# Altium PCB PCB4.PcbDoc
Units mil, origin at the board's own origin, x right, y up, seen from the top; angles counter-clockwise.
Board outline 6000 x 4000 mil, 2 copper layers (Top Layer, Bottom Layer); 36 components, 26 nets, 78 pads, 8 vias.
Unrouted connection lines stored in the file: 17.
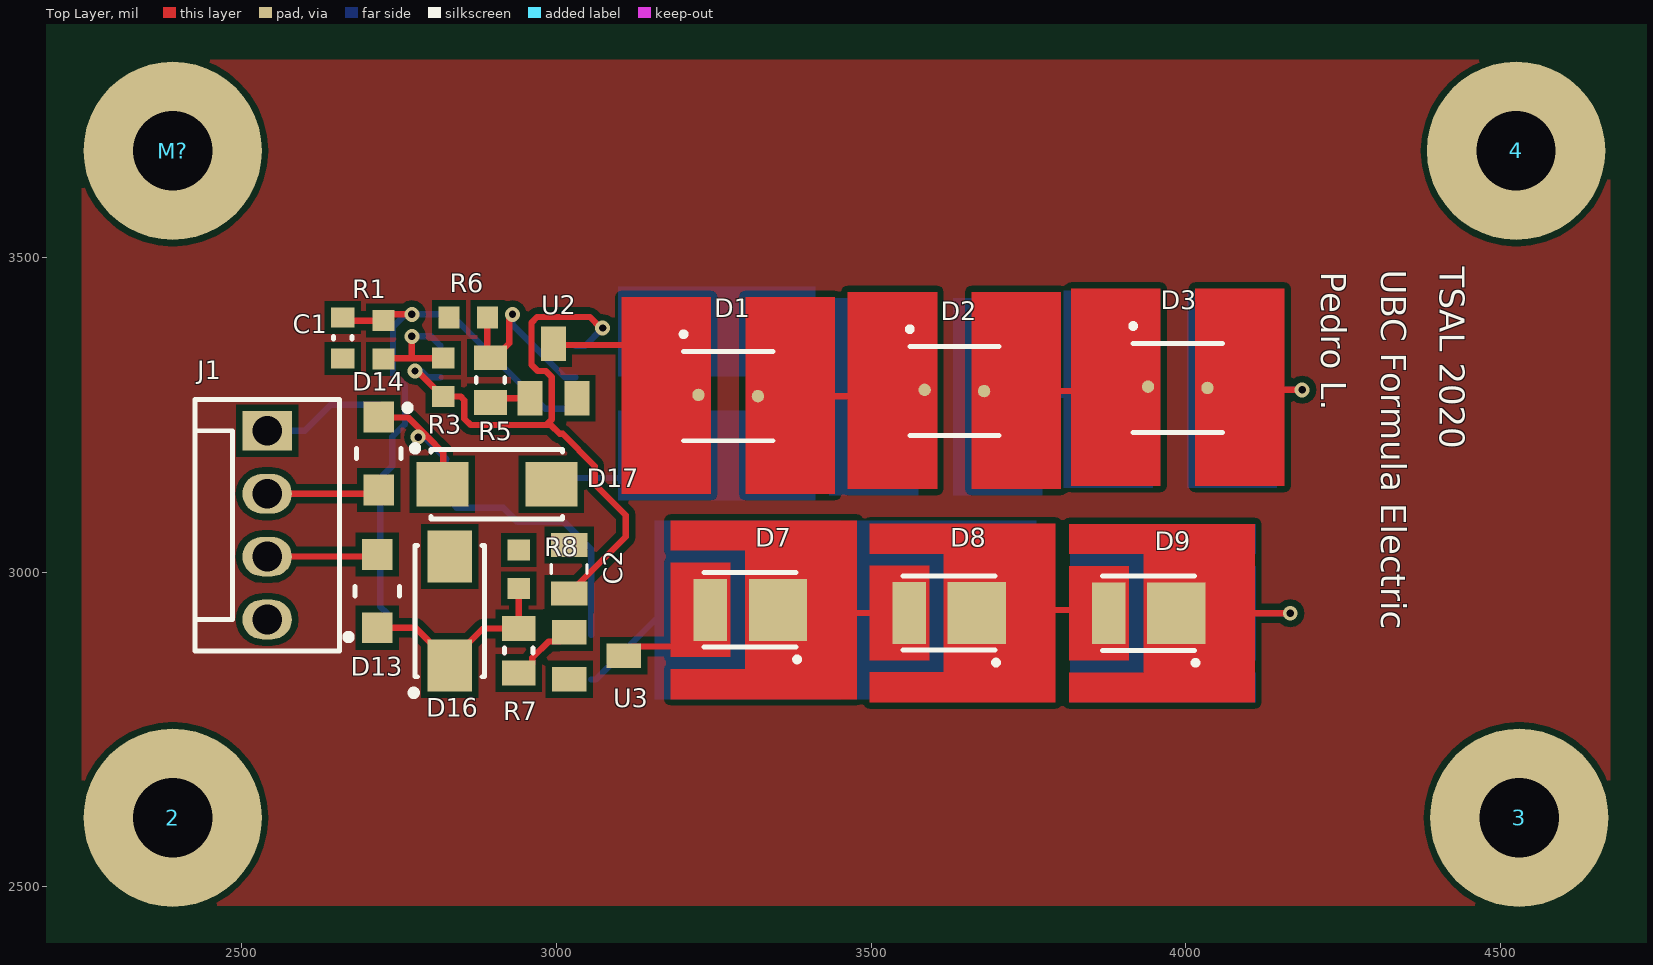
[diagram p0: Top Layer view]
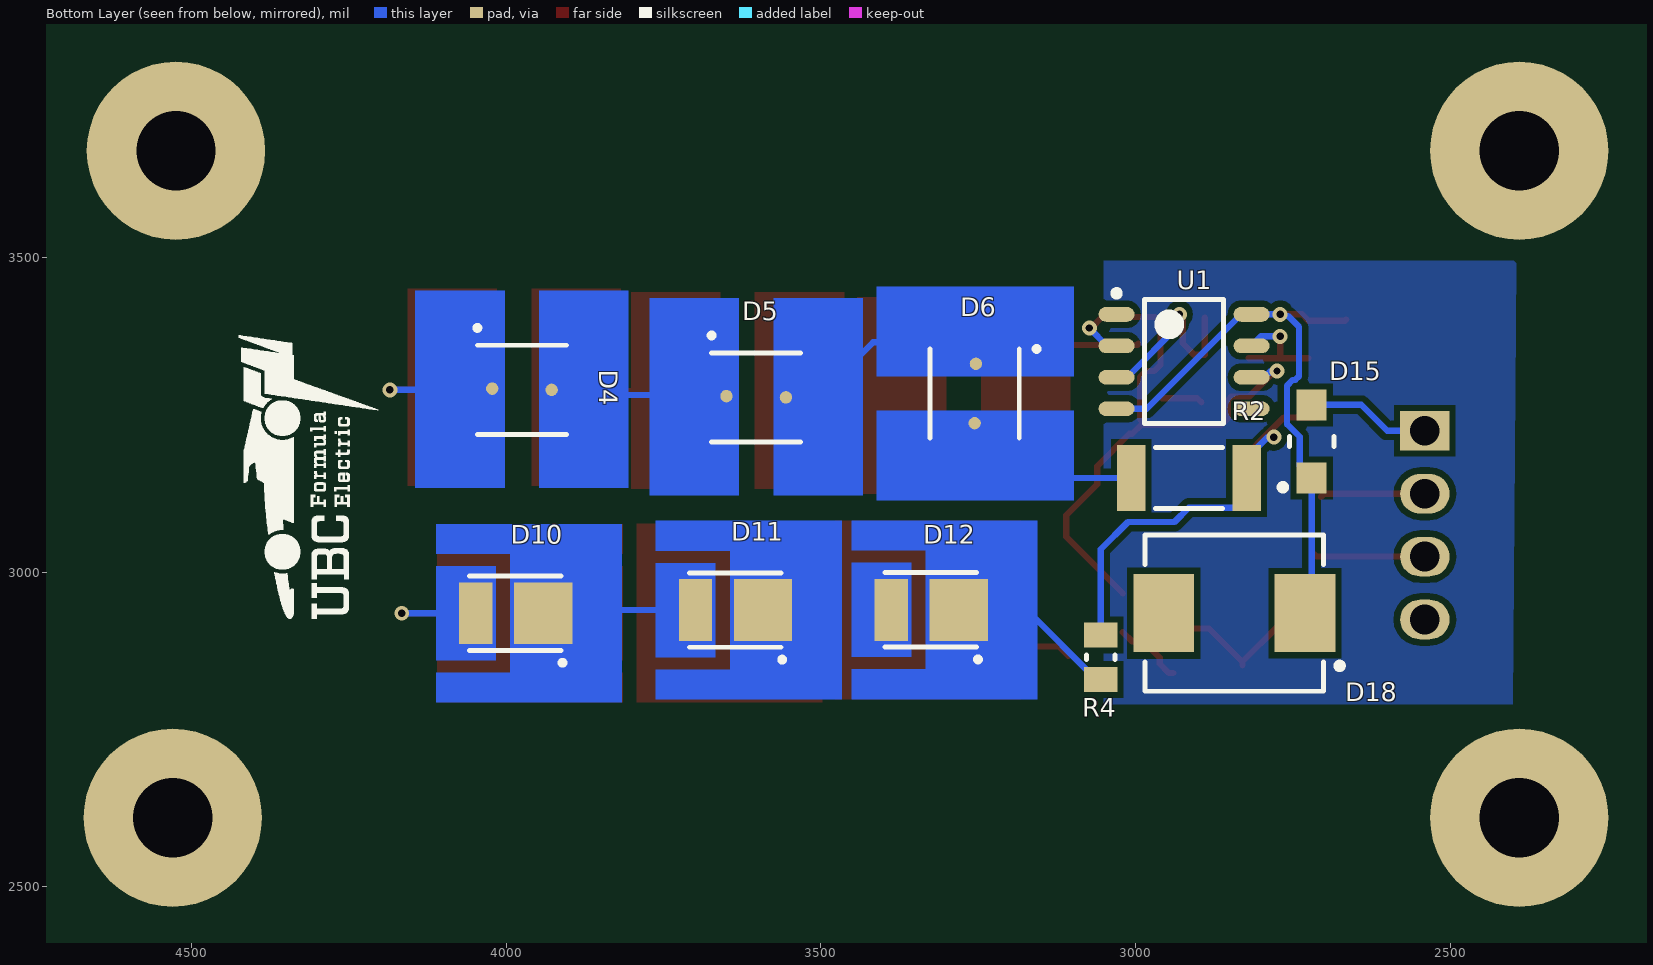
[diagram p1: Bottom Layer view, seen from below]
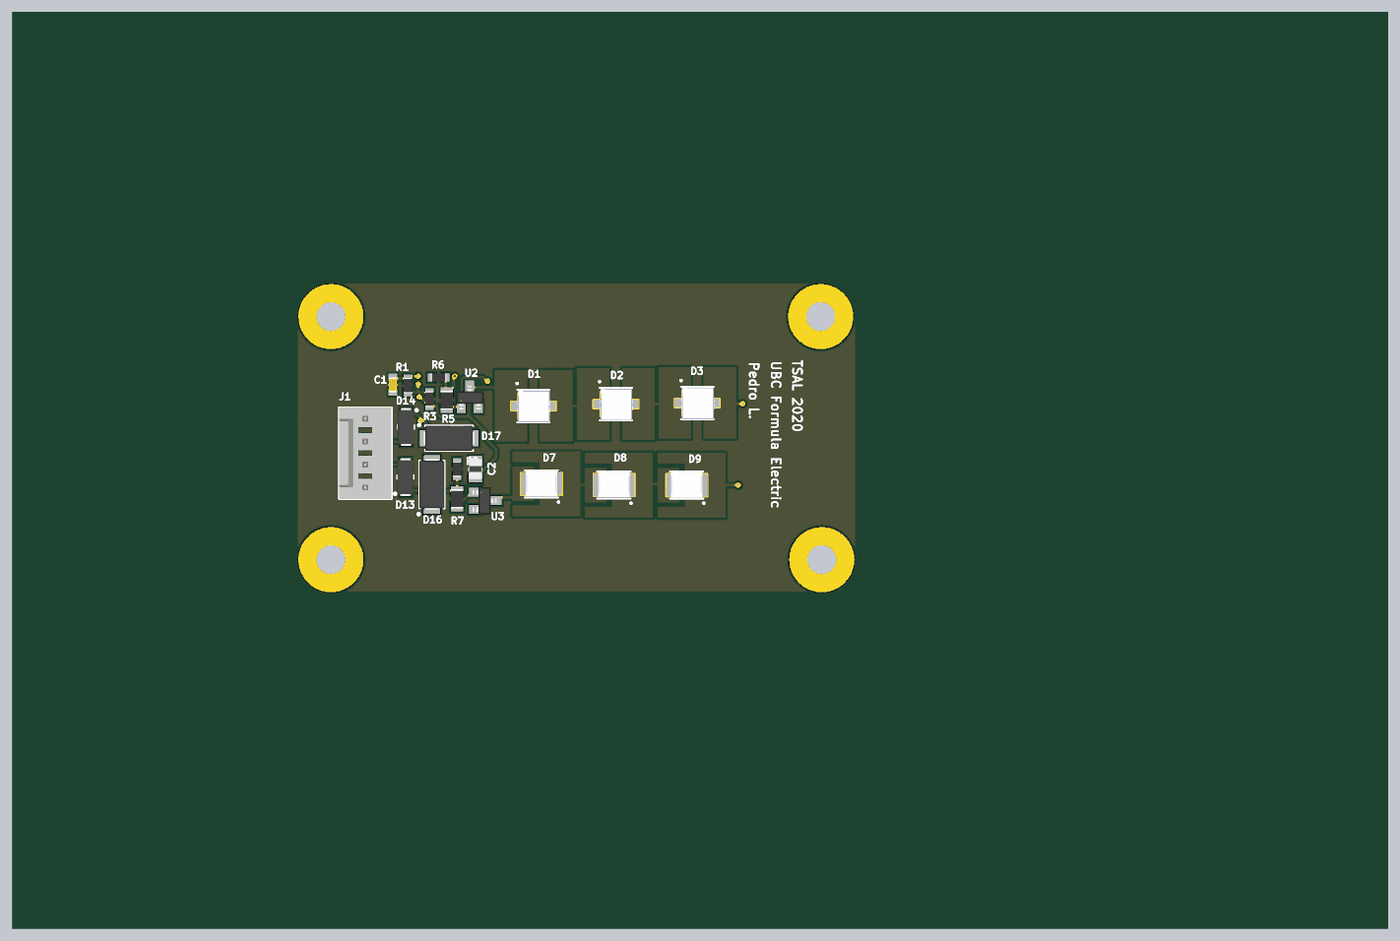
[diagram p2: 3D render of the assembled board from above, using the file's embedded part models]
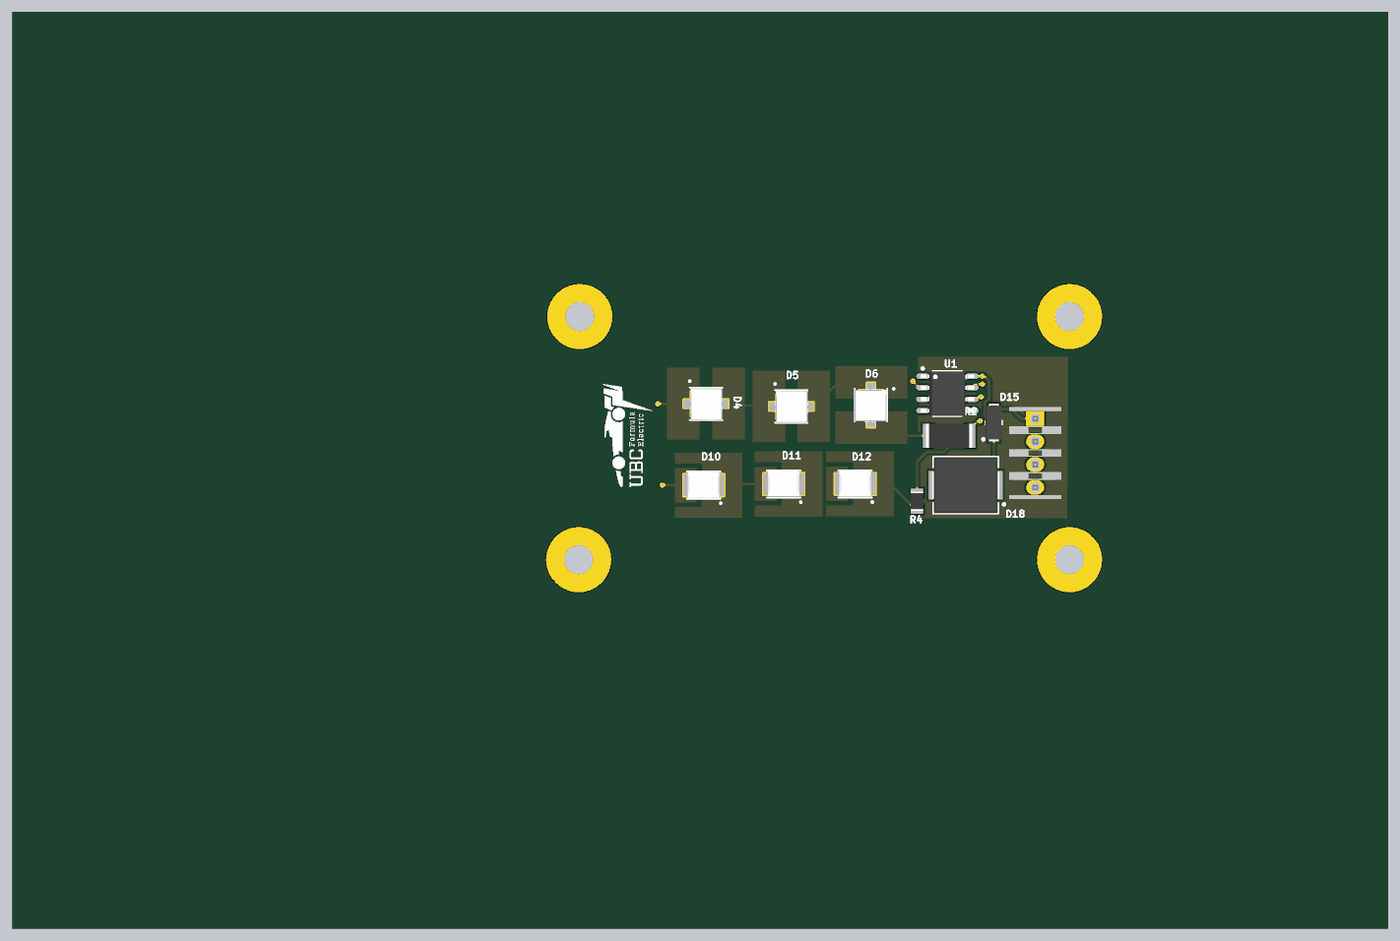
[diagram p3: 3D render of the assembled board from below, using the file's embedded part models]

## Layer stack, top to bottom
Top Solder: solder mask 0.4, Solder Resist, Dk 3.5
Top Layer: signal copper 1.4
Dielectric 1: dielectric 12.6, FR-4, Dk 4.8
Bottom Layer: signal copper 1.4
Bottom Solder: solder mask 0.4, Solder Resist, Dk 3.5

## Board outline
1000,1000 7000,1000 7000,5000 1000,5000

## Design rules (kind name [scope] priority, off if disabled: settings)
Clearance [All] p1: gap=10 ignorepadtopadclearanceinfootprint=FALSE except(0: Arc-Hole Track-Hole SMDPad-Hole THPad-Hole Via-Hole Fill-Hole Poly-Hole Region-Hole Text-Hole)
PolygonConnect [All] p1: connectstyle=Relief reliefconductorwidth=10 reliefentries=4 polygonreliefangle="90 Angle" airgapwidth=10
RoutingVias [All] p1: holewidth=28 width=50 viastyle="Through Hole" minholewidth=28 minwidth=50 maxholewidth=28 maxwidth=50
SolderMaskExpansion [All] p1: expansion=4 istentingtop=FALSE
Width [All] p1: maxlimit=10 minlimit=10 preferedwidth=10
30 further rules are at their usual default settings.

## Components (designator, comment, footprint, x,y, rotation, side; value= is the part's Value field where it differs from the comment)
2 "M3" "M3 Mounting Hole"#1 2390,2560 r90 top
3 "M3" "M3 Mounting Hole"#2 4530,2610 r90 top
4 "M3" "M3 Mounting Hole"#2 4525,3670 r90 top
C1 "0603" "0603 CAPACITOR (TDK C-SERIES)" 2660,3372.52 r270 top
C2 "X7R" RESC0805X60N 3020,3005 r90 top
D1 "RED" "RED LED" 3272.76,3280 r90 top
D2 "RED" "RED LED" 3632.24,3288.03 r90 top
D3 "RED" "RED LED" 3987.24,3293.03 r90 top
D4 "RED" "RED LED" 3975,3290 r90 bottom
D5 "RED" "RED LED" 3602.76,3278.03 r90 bottom
D6 "RED" "RED LED" 3255.51,3284.21 r180 bottom
D7 "GREEN" "GREEN LED" 3342.91,2940.32 r0 top
D8 "GREEN" "GREEN LED" 3659.06,2935.32 r0 top
D9 "GREEN" "GREEN LED" 3976.14,2935 r0 top
D10 "GREEN" "GREEN LED" 3950,2935 r180 bottom
D11 "GREEN" "GREEN LED" 3600.79,2940 r180 bottom
D12 "GREEN" "GREEN LED" 3289.61,2940.32 r180 bottom
D13 "NRVTS260ESFT1G" "ON NRVTS260ESFT1G" 2715,2970 r90 top
D14 "NRVTS260ESFT1G" "ON NRVTS260ESFT1G" 2717.5,3188.64 r270 top
D15 "NRVTS260ESFT1G" "ON NRVTS260ESFT1G" 2720,3208.07 r90 bottom
D16 "SMAJ6.0A" "LITTELFUSE SMAJ6.0A" 2830,2938.39 r90 top
D17 "SMAJ6.0A" "LITTELFUSE SMAJ6.0A" 2905,3140 r0 top
D18 "SMCJ24A" "LITTELFUSE SMCJ24A" 2842.8,2935 r0 bottom
J1 "1x4 Header" HDR1x4 2540,3075 r0 top
M? "M3" "M3 Mounting Hole"#3 2415,3700 r0 top
R1 "0603" "0603 RESISTOR (YAGEO)" 2725,3369.49 r90 top
R2 "2010" "2010 RESISTOR (YAGEO)" 2915,3150 r180 bottom
R3 "0603" "0603 RESISTOR (YAGEO)" 2820,3310 r90 top
R4 "RL1220S-270-F" "0805 RESISTOR (YAGEO)" 3055,2865 r90 bottom
R5 "0805" "0805 RESISTOR (YAGEO)" 2895,3305.43 r270 top
R6 "0603" "0603 RESISTOR (YAGEO)" 2859.49,3405 r0 top
R7 "0805" "0805 RESISTOR (YAGEO)" 2940,2875.43 r270 top
R8 "0603" "0603 RESISTOR (YAGEO)" 2940,3005 r270 top
U1 "555" SOIC-8 2922.72,3335 r180 bottom
U2 "2N7002ET1G" 2N7002ET1G 2995,3320 r0 top
U3 "2N7002ET1G" 2N7002ET1G 3063.31,2867.4 r270 top

## Footprints (in the part's own frame and the unit in brackets; to place one, negate y for a bottom-side part, rotate by r counter-clockwise, add the part's x,y. Pads: shape width x height; smd on the part's side, far side on the other; paste and mask are expansions set on the pad)
2N7002ET1G [mm]
  rect 1x1.4 smd: 1(-0.95,-1.1) 2(0.95,-1.1) 3(0,1.1)
  body extent -1.5,-1.4 1.55,1.24, height 1.12
"0603 CAPACITOR (TDK C-SERIES)" [mm] "Chip Capacitor, 2-Leads, Body 1.60x0.80mm, IPC Medium Density"
  rect 0.8x0.95 smd: 1(-0.825,0) 2(0.825,0)
  silkscreen extent -0.05,-0.38 0.05,0.38, body extent -0.85,-0.45 0.85,0.45, height 0.9
"0603 RESISTOR (YAGEO)" [mm] "Chip Resistor, 2-Leads, Body 1.60x0.80mm, IPC Medium Density"
  rect 0.85x0.9 smd: 1(-0.775,0) 2(0.775,0)
  body extent -0.85,-0.45 0.85,0.45, height 0.55
"0805 RESISTOR (YAGEO)" [mm] "Chip Resistor, 2-Leads, Body 2.00x1.25mm, IPC Medium Density"
  rect 1x1.35 smd: 1(-0.9,0) 2(0.9,0)
  silkscreen extent -0.1,-0.58 0.1,0.58, body extent -1.05,-0.67 1.05,0.67, height 0.6
"2010 RESISTOR (YAGEO)" [mm] "Chip Resistor, 2-Leads, Body 5.00x2.50mm, IPC Medium Density"
  rect 1.15x2.65 smd: 1(-2.325,0) 2(2.325,0)
  silkscreen extent -1.35,-1.22 1.35,1.23, body extent -2.55,-1.33 2.55,1.33, height 0.65
"GREEN LED" [mm]
  rect 1.35x2.5 smd: 1(-2.5,0)
  rect 2.35x2.5 smd: 2(0.225,0)
  Top Layer region: -4.1,-3.6 -4.1,-2.4 -1.1,-2.4 -1.1,-1.25 -1.1,1.25 -1.1,2.4 -4.1,2.4 -4.1,3.6 3.4,3.6 3.4,-3.6
  Top Layer region: -4.1,-1.9 -1.7,-1.9 -1.7,-1.25 -1.7,1.25 -1.7,1.9 -4.1,1.9
  silkscreen extent -2.75,-2.07 1.07,1.5, body extent -2.65,-1.35 0.85,1.45, height 0.81
HDR1x4 [mm]
  rect 2x1.6 hole 1.2: 1(0,3.81)
  oval 2x1.6 hole 1.2: 2(0,1.27) 3(0,-1.27) 4(0,-3.81)
  silkscreen extent -2.92,-5.08 2.92,5.08, body extent -2.9,-5.08 2.9,5.08, height 11.07
"LITTELFUSE SMAJ6.0A" [mm] "TVS DIODE 6V 10.3V DO214AC"
  rect 2.1x1.8 smd: 1(-2.2,0) 2(2.2,0)
  silkscreen extent -3.42,-1.4 2.65,1.57, body extent -2.86,-1.4 2.86,1.4, height 2.29
"LITTELFUSE SMCJ24A" [mm] "TVS DIODE 24V 38.9V DO214AB"
  rect 2.45x3.15 smd: 1(-2.85,0) 2(2.85,0)
  silkscreen extent -4.37,-3.15 3.6,3.15, body extent -3.77,-3.11 3.77,3.11, height 2.62
"M3 Mounting Hole"#1 [mm]
  round 7.2 hole 3.2: 1(1.27,0)
"M3 Mounting Hole"#2 [mm]
  round 7.2 hole 3.2: 1(0,0)
"M3 Mounting Hole"#3 [mm]
  round 7.2 hole 3.2: 1(-0.635,-0.762)
"ON NRVTS260ESFT1G" [mm] "DIODE SCHOTTKY 60V 2A SOD123FL"
  rect 1.25x1.22 smd: 1(-1.475,0) 2(1.475,0)
  silkscreen extent -1.97,-0.9 0.2,1.28, body extent -2.12,-0.9 2.12,0.9, height 0.98
"RED LED" [mm]
  round 0.5 smd: 1(0.05,1.2) 2(0,-1.2)
  Top Layer region: 4,0.7 4,4.3 -3.95,4.3 -3.95,0.7
  Top Layer region: 4,-0.7 4,-4.3 -3.95,-4.3 -3.95,-0.7
  Top Layer region: -1.4,-0.7 -1.4,-1.7 -0.5,-1.7 -0.5,-2.5 0.5,-2.5 0.5,-1.7 1.4,-1.7 1.4,-0.7
  Top Layer region: -1.4,0.7 -1.4,1.7 -0.5,1.7 -0.5,2.5 0.5,2.5 0.5,1.7 1.4,1.7 1.4,0.7
  silkscreen extent -1.8,-1.8 2.57,1.87, body extent -1.8,-1.86 1.7,1.76, height 1.26
RESC0805X60N [mm]
  rect 0.96x1.47 smd: 1(-0.978,0) 2(0.978,0)
  silkscreen extent -0.18,-0.72 0.18,0.72, body extent -1.1,-0.72 1.11,0.72, height 1.45
SOIC-8 [mm] "SOIC, 8-Leads, Body 4.91x3.90mm, Pitch 1.27mm, IPC Medium Density"
  oval 1.45x0.6 smd: 1(-2.725,1.905) 2(-2.725,0.635) 3(-2.725,-0.635) 4(-2.725,-1.905) 5(2.725,-1.905) 6(2.725,-0.635) 7(2.725,0.635) 8(2.725,1.905)
  silkscreen extent -2.85,-2.5 1.6,2.88, body extent -3,-2.5 3,2.5, height 1.75

## Part data
2 3 4 M?: library part "M3 Mounting Hole"
C1: library part CL10B103KB8NNNC, "Cap Ceramic 0.01uF 50VDC X7R 10% SMD 0603 Paper T/R", Capacitance=10nF, Case Code (Metric)=1608, Dielectric=X7R, Manufacturer=Samsung, Max Operating Temperature=125°C, Min Operating Temperature=-55°C, Package Quantity=1, Supplier Part Number 1=1276-1009-1-ND, Tolerance=10%, Voltage=50V, Case Code (Imperial)=0603, Case/Package=0603, Category="Ceramic Capacitors", ComponentLink1Description=https://datasheet.ciiva.com/15195/getdatasheetpartid-357415-15195721.pdf?src-supplier=Verical, ComponentLink1URL=https://datasheet.ciiva.com/15195/getdatasheetpartid-357415-15195721.pdf?src-supplier=Verical, ComponentLink2Description=https://datasheet.ciiva.com/29198/457455-da-01-en-vs-kondensator-0603-29198644.pdf?src-supplier=Conrad, ComponentLink2URL=https://datasheet.ciiva.com/29198/457455-da-01-en-vs-kondensator-0603-29198644.pdf?src-supplier=Conrad, ComponentLink3Description=https://datasheet.ciiva.com/20173/71-0315-20173334.pdf?src-supplier=Rapid+Electronics, ComponentLink3URL=https://datasheet.ciiva.com/20173/71-0315-20173334.pdf?src-supplier=Rapid+Electronics, Contact Plating=Tin, Depth=0.8mm, Height=0.8mm, Lead Free="Lead Free", Length=1.6mm, Manufacturer Part Number=CL10B103KB8NNNC, Material=Ceramic, Mount="Surface Mount", Packaging="Cut Tape", Pricing 1="1=0.10000, 10=0.02700, 50=0.01480, 100=0.01210, 500=0.00866, 1000=0.00681 (USD)", Radiation Hardening=No, RoHS=Yes, Stock 1=3003971, Supplier 1=Digi-Key, Thickness=0.035inch, Voltage Rating=50V, Voltage Rating (DC)=50V, Width=0.031inch
C2: library part CC0805KKX7R6BB105, "YAGEO - CC0805KKX7R6BB105 - Keramikvielschichtkondensator, SMD, 1 µF, 10 V, 0805 [Metrisch 2012], ± 10%, X7R, Baureihe CC", Capacitance=1uF, Case Code (Imperial)=0805, Case Code (Metric)=2012, Dielectric Material=Ceramic, Manufacturer=Yageo, Max Operating Temperature=125°C, Min Operating Temperature=-55°C, Package Quantity=1, Supplier Part Number 1=311-1458-1-ND, Tolerance=10%, Voltage Rating=10V, Case/Package=0805, Category="Ceramic Capacitors", ComponentLink1Description=https://datasheet.ciiva.com/13389/upy-gp-np0-16v-to-50v-8-13389349.pdf?src-supplier=Mouser, ComponentLink1URL=https://datasheet.ciiva.com/13389/upy-gp-np0-16v-to-50v-8-13389349.pdf?src-supplier=Mouser, ComponentLink2Description=https://datasheet.ciiva.com/46430/1734573-46430165.pdf?src-supplier=Element14, ComponentLink2URL=https://datasheet.ciiva.com/46430/1734573-46430165.pdf?src-supplier=Element14, ComponentLink3Description=https://datasheet.ciiva.com/28450/1489800-28450742.pdf?src-supplier=Element14, ComponentLink3URL=https://datasheet.ciiva.com/28450/1489800-28450742.pdf?src-supplier=Element14, ComponentLink4Description=https://datasheet.ciiva.com/7978/1489800-7978199.pdf?src-supplier=Element14, ComponentLink4URL=https://datasheet.ciiva.com/7978/1489800-7978199.pdf?src-supplier=Element14, ComponentLink5Description=https://datasheet.ciiva.com/176/mlccorderingcode-176908.pdf?src-supplier=Digi-Key, ComponentLink5URL=https://datasheet.ciiva.com/176/mlccorderingcode-176908.pdf?src-supplier=Digi-Key, ComponentLink6Description=https://datasheet.ciiva.com/11583/upy-gphc-x7r-6-3v-to-50v-8-11583596.pdf?src-supplier=Avnet, ComponentLink6URL=https://datasheet.ciiva.com/11583/upy-gphc-x7r-6-3v-to-50v-8-11583596.pdf?src-supplier=Avnet, ComponentLink7Description=https://datasheet.ciiva.com/176/mlccorderingcode-176909.pdf?src-supplier=Digi-Key, ComponentLink7URL=https://datasheet.ciiva.com/176/mlccorderingcode-176909.pdf?src-supplier=Digi-Key, ComponentLink8Description=https://datasheet.ciiva.com/8033/1489800-8033973.pdf?src-supplier=Element14, ComponentLink8URL=https://datasheet.ciiva.com/8033/1489800-8033973.pdf?src-supplier=Element14, ComponentLink9Description=https://datasheet.ciiva.com/17437/upy-gphc-x7r-6-3v-to-50v-8-17437525.pdf?src-supplier=Avnet+Europe, ComponentLink9URL=https://datasheet.ciiva.com/17437/upy-gphc-x7r-6-3v-to-50v-8-17437525.pdf?src-supplier=Avnet+Europe, ComponentLink10Description=https://datasheet.ciiva.com/176/mlccorderingcode-176907.pdf?src-supplier=Digi-Key, ComponentLink10URL=https://datasheet.ciiva.com/176/mlccorderingcode-176907.pdf?src-supplier=Digi-Key, ComponentLink11Description=https://datasheet.ciiva.com/8033/1489800-8033998.pdf?src-supplier=Element14, ComponentLink11URL=https://datasheet.ciiva.com/8033/1489800-8033998.pdf?src-supplier=Element14, Depth=1.25mm, Dielectric=X7R, Halogen Free="Halogen Free", Height=1.25mm, Lead Free="Lead Free", Length=2mm, Manufacturer Part Number=CC0805KKX7R6BB105, Mount="Surface Mount", Number of Pins=2, Packaging="Tape and Reel", Pricing 1="1=0.16000, 10=0.11300, 50=0.06440, 100=0.05340, 500=0.03740, 1000=0.03097 (USD)", Radiation Hardening=No, REACH SVHC=Unknown, Resistor Type=Ceramic, RoHS=Yes, Stock 1=620418, Supplier 1=Digi-Key, Termination=SMD/SMT, Thickness=0.057inch, Voltage Rating (DC)=10V, Width=1.25mm
D1 D2 D3 D4 D5 D6: library part OVS5MRBCR4, "LED 0.33W RED WTR CLR 3.5MM", Case/Package=SMD/SMT, Color=Red, Forward Current=200mA, Forward Voltage=2.2V, Manufacturer="TT Optek", Max Operating Temperature=100°C, Max Power Dissipation=330mW, Min Operating Temperature=-40°C, Package Quantity=1, Power Dissipation=750mW, Power Rating=500mW, Reverse Voltage=12V, Supplier Part Number 1=365-1546-1-ND, Test Current=150mA, Category=LEDs, ComponentLink1Description=https://datasheet.ciiva.com/2126/ovs5mabcr4-2126832.pdf?src-supplier=Digi-Key, ComponentLink1URL=https://datasheet.ciiva.com/2126/ovs5mabcr4-2126832.pdf?src-supplier=Digi-Key, ComponentLink2Description=https://datasheet.ciiva.com/16224/ovs5mrbcr4-16224208.pdf?src-supplier=Future+Electronics, ComponentLink2URL=https://datasheet.ciiva.com/16224/ovs5mrbcr4-16224208.pdf?src-supplier=Future+Electronics, ComponentLink3Description=https://datasheet.ciiva.com/2126/ovs5mabcr4-2126833.pdf?src-supplier=Digi-Key, ComponentLink3URL=https://datasheet.ciiva.com/2126/ovs5mabcr4-2126833.pdf?src-supplier=Digi-Key, ComponentLink4Description=https://datasheet.ciiva.com/46403/ovs5mabcr4-46403613.pdf?src-supplier=Element14, ComponentLink4URL=https://datasheet.ciiva.com/46403/ovs5mabcr4-46403613.pdf?src-supplier=Element14, ComponentLink5Description=https://datasheet.ciiva.com/2126/ovs5mabcr4-2126831.pdf?src-supplier=Digi-Key, ComponentLink5URL=https://datasheet.ciiva.com/2126/ovs5mabcr4-2126831.pdf?src-supplier=Digi-Key, Depth=3.5mm, Dominant Wavelength=625nm, Illumination Color=Red, Lead Free="Lead Free", Length=3.5mm, Lens Style=Clear,Diffused,Colorless, Luminous Intensity=7150mcd, Manufacturer Part Number=OVS5MRBCR4, Max Current Rating=200mA, Mount="Surface Mount", Number of Elements=1, Number of Pins=2, Packaging="Cut Tape", Pricing 1="1=0.96000, 100=0.92400, 250=0.88000, 500=0.85800 (USD)", REACH SVHC="No SVHC", RoHS=Yes, Stock 1=10132, Supplier 1=Digi-Key, Viewing Angle=120°, Wavelength=625nm
D7 D8 D9 D10 D11 D12: library part XZDG25X109FS, "Led 3.5X2.8 0.5W SMD Green", Case Code (Imperial)=1411, Case Code (Metric)=3528, Color=Green, Forward Voltage=3.5V, Lens Color=Colorless, Manufacturer=SunLED, Supplier Part Number 1=1497-1345-1-ND, Test Current=150mA, Case/Package=1411, Category=LEDs, ComponentLink1Description=http://www.sunledusa.com/products/spec/XZDG25X109FS.pdf?src-supplier=Digi-Key, ComponentLink1URL=http://www.sunledusa.com/products/spec/XZDG25X109FS.pdf?src-supplier=Digi-Key, ComponentLink2Description=https://www.sunledusa.com/products/spec/XZDG25X109FS.pdf?src-supplier=Digi-Key, ComponentLink2URL=https://www.sunledusa.com/products/spec/XZDG25X109FS.pdf?src-supplier=Digi-Key, Dominant Wavelength=525nm, Height=1.05mm, Length=3.5mm, Lens Size=2.5mm, Lens Style=Round,Flat, Lens Transparency=Clear, Luminous Intensity=6990mcd, Manufacturer Part Number=XZDG25X109FS, Mount="Surface Mount", Packaging="Cut Tape", Pricing 1="1=1.83000, 10=1.61300, 100=0.93630, 500=0.84640, 1000=0.72738 (USD)", RoHS=No, Stock 1=1496, Supplier 1=Digi-Key, Viewing Angle=120°, Width=2.8mm
D13 D14 D15: "ON SEMICONDUCTOR - NRVTS260ESFT1G - Schottky Rectifier, 60 V, 2 A, Single, SOD-123, 2 Pins, 650 mV", Average Rectified Current=2A, Case/Package=SOD, Forward Voltage=650mV, Manufacturer="ON Semiconductor", Max Forward Surge Current (Ifsm)=25A, Max Operating Temperature=175°C, Max Repetitive Reverse Voltage (Vrrm)=60V, Max Reverse Current=12uA, Min Operating Temperature=-65°C, Package Quantity=1, Peak Non-Repetitive Surge Current=50A, Supplier Part Number 1=NRVTS260ESFT1GOSCT-ND, Category="Schottky Diodes", ComponentLink1Description=https://datasheet.ciiva.com/53019/nts260esf-d-53019548.pdf?src-supplier=Digi-Key, ComponentLink1URL=https://datasheet.ciiva.com/53019/nts260esf-d-53019548.pdf?src-supplier=Digi-Key, Element Configuration=Single, Forward Current=2A, Height=0.88mm, Lead Free="Lead Free", Length=2.9mm, Manufacturer Part Number=NRVTS260ESFT1G, Max Reverse Voltage (DC)=60V, Mount="Surface Mount", Number of Pins=2, Packaging="Cut Tape", Pricing 1="1=0.34000, 10=0.22100, 100=0.11060, 500=0.09164, 1000=0.06004 (USD)", REACH SVHC="No SVHC", Reverse Voltage (DC)=60V, RoHS=Yes, Supplier 1=Digi-Key, Width=1.8mm
D16 D17: "In a Pack of 25, Littelfuse SMAJ6.0A, Uni-Directional TVS Diode, 400W, 2-Pin DO-214AC", Breakdown Voltage=6.67V, Clamping Voltage=10.3V, Current=41A, Leakage Current=1uA, Manufacturer=Littelfuse, Max Breakdown Voltage=7.37V, Max Operating Temperature=150°C, Max Power Dissipation=3.3W, Max Surge Current=38.8A, Min Operating Temperature=-55°C, Operating Supply Voltage=6V, Package Quantity=1, Peak Pulse Current=4.1A, Peak Pulse Power=400W, Power Line Protection=No, Resistor Type=Zener, Reverse Breakdown Voltage=66.7V, Supplier Part Number 1=SMAJ6.0ALFCT-ND, Test Current=1mA, Voltage=60V, Category="TVS Diodes", ComponentLink1Description=https://datasheet.ciiva.com/330/littelfuse-tvs-diode-smaj-datasheet-pdf-330721.pdf?src-supplier=Digi-Key, ComponentLink1URL=https://datasheet.ciiva.com/330/littelfuse-tvs-diode-smaj-datasheet-pdf-330721.pdf?src-supplier=Digi-Key, ComponentLink2Description=https://datasheet.ciiva.com/330/littelfuse-tvs-diode-smaj-datasheet-pdf-330722.pdf?src-supplier=Digi-Key, ComponentLink2URL=https://datasheet.ciiva.com/330/littelfuse-tvs-diode-smaj-datasheet-pdf-330722.pdf?src-supplier=Digi-Key, ComponentLink3Description=https://datasheet.ciiva.com/330/littelfuse-tvs-diode-smaj-datasheet-pdf-330723.pdf?src-supplier=Digi-Key, ComponentLink3URL=https://datasheet.ciiva.com/330/littelfuse-tvs-diode-smaj-datasheet-pdf-330723.pdf?src-supplier=Digi-Key, ComponentLink4Description=https://datasheet.ciiva.com/330/littelfuse-tvs-diode-smaj-datasheet-pdf-330712.pdf?src-supplier=Digi-Key, ComponentLink4URL=https://datasheet.ciiva.com/330/littelfuse-tvs-diode-smaj-datasheet-pdf-330712.pdf?src-supplier=Digi-Key, ComponentLink5Description=https://datasheet.ciiva.com/28473/607617-28473464.pdf?src-supplier=Element14, ComponentLink5URL=https://datasheet.ciiva.com/28473/607617-28473464.pdf?src-supplier=Element14, ComponentLink6Description=https://datasheet.ciiva.com/330/littelfuse-tvs-diode-smaj-datasheet-pdf-330713.pdf?src-supplier=Digi-Key, ComponentLink6URL=https://datasheet.ciiva.com/330/littelfuse-tvs-diode-smaj-datasheet-pdf-330713.pdf?src-supplier=Digi-Key, ComponentLink7Description=https://datasheet.ciiva.com/16391/littelfuse-tvs-diode-smaj-16391801.pdf?src-supplier=Future+Electronics, ComponentLink7URL=https://datasheet.ciiva.com/16391/littelfuse-tvs-diode-smaj-16391801.pdf?src-supplier=Future+Electronics, ComponentLink8Description=https://datasheet.ciiva.com/16487/littelfuse-tvs-diode-smaj-16487499.pdf?src-supplier=Future+Electronics, ComponentLink8URL=https://datasheet.ciiva.com/16487/littelfuse-tvs-diode-smaj-16487499.pdf?src-supplier=Future+Electronics, Direction=Unidirectional, Height=2.29mm, Lead Free="Lead Free", Length=5.28mm, Manufacturer Part Number=SMAJ6.0A, Min Breakdown Voltage=6.67V, Mount="Surface Mount", Number of Channels=1, Number of Elements=1, Number of Pins=2, Number of Unidirectional Channels=1, Packaging="Cut Tape", Polarity=Unidirectional, Power Dissipation=400W, Pricing 1="1=0.36000, 10=0.24800, 100=0.14180, 500=0.10800, 1000=0.07875, 2000=0.07650 (USD)", Radiation Hardening=No, REACH SVHC="No SVHC", Reverse Standoff Voltage=6V, RoHS=Yes, Stock 1=50756, Supplier 1=Digi-Key, Termination=SMD/SMT, Voltage Rating (DC)=6V, Width=2.79mm
D18: "LITTELFUSE - SMCJ24A - TVS Diode, TRANSZORB SMCJ Series, Unidirectional, 24 V, 38.9 V, DO-214AB (SMC), 2 Pins", Breakdown Voltage=26.7V, Clamping Voltage=38.9V, Leakage Current=1uA, Manufacturer=Littelfuse, Max Breakdown Voltage=29.5V, Max Operating Temperature=150°C, Max Power Dissipation=6.5W, Max Surge Current=38.6A, Min Operating Temperature=-65°C, Operating Supply Voltage=24V, Package Quantity=1, Peak Pulse Power=1.5kW, Power Line Protection=No, Resistor Type=Zener, Supplier Part Number 1=SMCJ24ALFCT-ND, Test Current=1mA, Category=Diodes, ComponentLink1Description=https://datasheet.ciiva.com/341/littelfuse-tvs-diode-smcj-datasheet-pdf-341029.pdf?src-supplier=Digi-Key, ComponentLink1URL=https://datasheet.ciiva.com/341/littelfuse-tvs-diode-smcj-datasheet-pdf-341029.pdf?src-supplier=Digi-Key, ComponentLink2Description=https://datasheet.ciiva.com/8062/littelfuse-tvs-diode-smcj-8062373.pdf?src-supplier=Element14, ComponentLink2URL=https://datasheet.ciiva.com/8062/littelfuse-tvs-diode-smcj-8062373.pdf?src-supplier=Element14, ComponentLink3Description=https://datasheet.ciiva.com/341/littelfuse-tvs-diode-smcj-datasheet-pdf-341030.pdf?src-supplier=Digi-Key, ComponentLink3URL=https://datasheet.ciiva.com/341/littelfuse-tvs-diode-smcj-datasheet-pdf-341030.pdf?src-supplier=Digi-Key, ComponentLink4Description=https://datasheet.ciiva.com/341/littelfuse-tvs-diode-smcj-datasheet-pdf-341031.pdf?src-supplier=Digi-Key, ComponentLink4URL=https://datasheet.ciiva.com/341/littelfuse-tvs-diode-smcj-datasheet-pdf-341031.pdf?src-supplier=Digi-Key, Direction=Unidirectional, Element Configuration=Single, Height=2.417mm, Lead Free="Lead Free", Length=7.11mm, Manufacturer Part Number=SMCJ24A, Max Reverse Leakage Current=1uA, Min Breakdown Voltage=26.7V, Mount="Surface Mount", Number of Channels=1, Number of Elements=1, Number of Pins=2, Number of Unidirectional Channels=1, Packaging="Cut Tape", Peak Pulse Current=38.6A, Polarity=Unidirectional, Power Dissipation=1.5kW, Pricing 1="1=0.55000, 10=0.43800, 100=0.31250, 500=0.23750, 1000=0.18750 (USD)", REACH SVHC="No SVHC", Reverse Breakdown Voltage=26.7V, Reverse Standoff Voltage=24V, RoHS=Yes, Stock 1=17092, Supplier 1=Digi-Key, Termination=SMD/SMT, Voltage Rating (DC)=24V, Width=6.22mm
J1: library part 22-27-2041, "Conn Wire to Board HDR 4 POS 2.54mm Solder ST Thru-Hole Bag", Color=Natural, Contact Resistance=10mR, Housing Color=White, Manufacturer=Molex, Max Operating Temperature=75°C, Min Operating Temperature=0°C, Supplier Part Number 1=WM4113-ND, Category="Headers and Wire Housings", ComponentLink1Description=https://datasheet.ciiva.com/6813/022272021-sd-6813678.pdf?src-supplier=Digi-Key, ComponentLink1URL=https://datasheet.ciiva.com/6813/022272021-sd-6813678.pdf?src-supplier=Digi-Key, ComponentLink2Description=https://datasheet.ciiva.com/7844/1625756-7844114.pdf?src-supplier=Element14, ComponentLink2URL=https://datasheet.ciiva.com/7844/1625756-7844114.pdf?src-supplier=Element14, ComponentLink3Description=https://datasheet.ciiva.com/11746/0900766b80462714-11746241.pdf?src-supplier=RSComponents, ComponentLink3URL=https://datasheet.ciiva.com/11746/0900766b80462714-11746241.pdf?src-supplier=RSComponents, ComponentLink4Description=https://datasheet.ciiva.com/20207/22-0838e-20207115.pdf?src-supplier=Rapid+Electronics, ComponentLink4URL=https://datasheet.ciiva.com/20207/22-0838e-20207115.pdf?src-supplier=Rapid+Electronics, ComponentLink5Description=https://datasheet.ciiva.com/15217/getdatasheetpartid-176661-15217685.pdf?src-supplier=Verical, ComponentLink5URL=https://datasheet.ciiva.com/15217/getdatasheetpartid-176661-15217685.pdf?src-supplier=Verical, ComponentLink6Description=https://datasheet.ciiva.com/49385/879300-49385686.pdf?src-supplier=Jameco, ComponentLink6URL=https://datasheet.ciiva.com/49385/879300-49385686.pdf?src-supplier=Jameco, Connector Type="Male Pin", Contact Material=Brass, Contact Mating Length=0.295inch, Contact Plating=Tin,Copper, Depth=5.8mm, Fastening Type=Friction, Gender=Male, Housing Material=Nylon, Length=10.16mm, Manufacturer Part Number=22-27-2041, Mount="Surface Mount", Number of Contacts=4, Number of Positions=4, Number of Rows=1, Orientation=Straight, Packaging="Cut Tape", Pitch=2.54mm, Pricing 1="1=0.40000, 10=0.38300, 100=0.26800, 500=0.22974, 1000=0.19145, 5000=0.16410, 10000=0.15316 (USD)", RoHS=Yes, Stock 1=5089, Supplier 1=Digi-Key, Termination=Solder
R1: library part CRCW060322K0FKEAC, "Res Thick Film 0603 22K Ohm 1% 1/10W ±100ppm/°C Molded SMD Paper T/R", Case/Package=Molded, Manufacturer="Vishay Semiconductors", Max Operating Temperature=155°C, Min Operating Temperature=-55°C, Power Rating=100mW, Resistance=22k, Resistor Type="Thick Film", Supplier Part Number 1=541-4036-1-ND, Temperature Coefficient=100ppm/°C, Tolerance=1%, Category=Resistors, ComponentLink1Description=http://www.vishay.com/docs/28773/crcwce3.pdf?src-supplier=Digi-Key, ComponentLink1URL=http://www.vishay.com/docs/28773/crcwce3.pdf?src-supplier=Digi-Key, ComponentLink2Description=http://www.vishay.com/docs/20035/dcrcwe3.pdf?src-supplier=Avnet+Asia, ComponentLink2URL=http://www.vishay.com/docs/20035/dcrcwe3.pdf?src-supplier=Avnet+Asia, Contact Plating=Tin, Lead Free="Lead Free", Length=1.55mm, Manufacturer Part Number=CRCW060322K0FKEAC, Mount="Surface Mount", Pricing 1="1=0.10000, 10=0.03100, 100=0.01260, 1000=0.00567, 2500=0.00492 (USD)", RoHS=Yes, Stock 1=48223, Supplier 1=Digi-Key, Termination=Wraparound
R2: "TE CONNECTIVITY - CRGP2010F100R - RES, 100R, 1%, 1.25W, 2010, THICK FILM", Manufacturer="TE Connectivity", Manufacturer Part Number=CRGP2010F100R, Resistence=100R, Supplier Part Number 1=A130648CT-ND, Category="Chip SMD Resistors", ComponentLink1Description=https://www.te.com/commerce/DocumentDelivery/DDEController?Action=srchrtrv&amp;DocNm=9-1773463-9&amp;DocType=DS&amp;DocLang=English&src-supplier=Digi-Key, ComponentLink1URL=https://www.te.com/commerce/DocumentDelivery/DDEController?Action=srchrtrv&amp;DocNm=9-1773463-9&amp;DocType=DS&amp;DocLang=English&src-supplier=Digi-Key, ComponentLink2Description=https://4donline.ihs.com/images/VipMasterIC/IC/TYEL/TYEL-S-A0005460475/TYEL-S-A0005460475-1.pdf?hkey=52A5661711E402568146F3353EA87419&src-supplier=Farnell, ComponentLink2URL=https://4donline.ihs.com/images/VipMasterIC/IC/TYEL/TYEL-S-A0005460475/TYEL-S-A0005460475-1.pdf?hkey=52A5661711E402568146F3353EA87419&src-supplier=Farnell, ComponentLink3Description=https://4donline.ihs.com/images/VipMasterIC/IC/TYEL/TYEL-S-A0005460475/TYEL-S-A0005460475-1.pdf?hkey=52A5661711E402568146F3353EA87419&src-supplier=Newark, ComponentLink3URL=https://4donline.ihs.com/images/VipMasterIC/IC/TYEL/TYEL-S-A0005460475/TYEL-S-A0005460475-1.pdf?hkey=52A5661711E402568146F3353EA87419&src-supplier=Newark, Pricing 1="1=0.37000, 10=0.28600, 100=0.12040, 1000=0.06643 (USD)", RoHS=No, Stock 1=14514, Supplier 1=Digi-Key
R3 R6 R8: library part CRCW0603200KFKEAC, "Res Thick Film 0603 200K Ohm 1% 1/10W ±100ppm/°C Molded SMD Paper T/R", Case/Package=Molded, Manufacturer=Vishay, Max Operating Temperature=155°C, Min Operating Temperature=-55°C, Power Rating=100mW, Resistance=200k, Resistor Type="Thick Film", Supplier Part Number 1=541-4027-1-ND, Temperature Coefficient=100ppm/°C, Tolerance=1%, Category=Resistors, ComponentLink1Description=http://www.vishay.com/docs/28773/crcwce3.pdf?src-supplier=Digi-Key, ComponentLink1URL=http://www.vishay.com/docs/28773/crcwce3.pdf?src-supplier=Digi-Key, Contact Plating=Tin, Lead Free="Lead Free", Length=1.55mm, Manufacturer Part Number=CRCW0603200KFKEAC, Mount="Surface Mount", Pricing 1="1=0.10000, 10=0.03100, 100=0.01260, 1000=0.00567, 2500=0.00492 (USD)", RoHS=Yes, Stock 1=12235, Supplier 1=Digi-Key, Termination=Wraparound
R4: "RES SMD 27 OHM 1% 1/3W 0805", Case/Package=0805, Manufacturer=Susumu, Package Quantity=1, Resistance=27R, Supplier Part Number 1=408-1396-1-ND, Category="Chip SMD Resistors", ComponentLink1Description=http://www.mouser.com/ds/2/392/RL_Data_sheet-263250.pdf?src-supplier=Mouser, ComponentLink1URL=http://www.mouser.com/ds/2/392/RL_Data_sheet-263250.pdf?src-supplier=Mouser, ComponentLink2Description=http://www.susumu.co.jp/common/pdf/n_catalog_partition08_en.pdf?src-supplier=Digi-Key, ComponentLink2URL=http://www.susumu.co.jp/common/pdf/n_catalog_partition08_en.pdf?src-supplier=Digi-Key, Height=0.4mm, Length=2mm, Manufacturer Part Number=RL1220S-270-F, Packaging="Cut Tape", Pricing 1="1=0.34000, 10=0.28900, 25=0.21000, 50=0.15220, 100=0.11290, 250=0.08664, 500=0.06826, 1000=0.04725 (USD)", RoHS=Yes, Stock 1=2466, Supplier 1=Digi-Key, Termination=SMD/SMT, Weight=0.000194oz, Width=1.25mm
R5 R7: library part RT0805DRD07100RL, "RES SMD 100 OHM 0.5% 1/8W 0805", Case Code (Metric)=2012, Manufacturer=Yageo, Max Operating Temperature=155°C, Max Power Dissipation=125mW, Min Operating Temperature=-55°C, Package Quantity=1, Resistance=100R, Resistor Type="Thin Film", Supplier Part Number 1=311-2698-1-ND, Temperature Coefficient=25ppm/°C, Tolerance=0.5%, Voltage Rating (DC)=150V, Case Code (Imperial)=0805, Case/Package=0805, Category="Chip SMD Resistors", ComponentLink1Description=https://datasheet.ciiva.com/2575/pyu-rt-1-to-0-05-rohs-l-5-2575581.pdf?src-supplier=Digi-Key, ComponentLink1URL=https://datasheet.ciiva.com/2575/pyu-rt-1-to-0-05-rohs-l-5-2575581.pdf?src-supplier=Digi-Key, Contact Plating=Tin,Matte, Features="Moisture Resistant", Height=0.024inch, Lead Free="Lead Free", Length=0.079inch, Manufacturer Part Number=RT0805DRD07100RL, Number of Terminations=2, Packaging="Cut Tape", Power Rating=125mW, Pricing 1="1=0.23000, 10=0.19200, 100=0.07490, 1000=0.03137, 2500=0.02876 (USD)", Radiation Hardening=No, RoHS=Yes, Stock 1=7222, Supplier 1=Digi-Key, Width=0.049inch
U1: library part SA555DRG4, "IC OSC SGL TIMER 100KHZ 8-SOIC", Case/Package=SOIC, Frequency=100kHz, High Level Output Current=-200mA, Low Level Output Current=200mA, Manufacturer="Texas Instruments", Max Operating Temperature=85°C, Max Supply Voltage=16V, Min Operating Temperature=-40°C, Min Supply Voltage=4.5V, Nominal Supply Current=2mA, Operating Supply Current=10mA, Package Quantity=1, Quiescent Current=15mA, Supplier Part Number 1=296-48948-1-ND, Category="Timers and Oscillators", ComponentLink1Description=https://datasheet.ciiva.com/26943/getdatasheetpartid-624446-26943897.pdf?src-supplier=Verical, ComponentLink1URL=https://datasheet.ciiva.com/26943/getdatasheetpartid-624446-26943897.pdf?src-supplier=Verical, ComponentLink2Description=https://datasheet.ciiva.com/1235/sa555-1235928.pdf?src-supplier=Digi-Key, ComponentLink2URL=https://datasheet.ciiva.com/1235/sa555-1235928.pdf?src-supplier=Digi-Key, ComponentLink3Description=https://datasheet.ciiva.com/14274/se555m-14274518.pdf?src-supplier=Avnet, ComponentLink3URL=https://datasheet.ciiva.com/14274/se555m-14274518.pdf?src-supplier=Avnet, Lead Free="Lead Free", Manufacturer Part Number=SA555DRG4, Mount="Surface Mount", Number of Pins=8, Number of Timers/Counters=1, Packaging="Cut Tape", Pricing 1="1=0.39000, 10=0.31500, 25=0.28800, 100=0.21440, 250=0.19432, 500=0.16080, 1000=0.12060 (USD)", Radiation Hardening=No, RoHS=Yes, Stock 1=1131, Supplier 1=Digi-Key, Weight=0.002561oz
U2 U3: "Trans MOSFET N-CH 60V 0.26A 3-Pin SOT-23 T/R", Case/Package=SOT-23-3, Continuous Drain Current (ID)=260mA, Drain to Source Breakdown Voltage=60V, Drain to Source Resistance=2.5R, Gate to Source Voltage (Vgs)=20V, Input Capacitance=26.7pF, Manufacturer="ON Semiconductor", Max Operating Temperature=150°C, Max Power Dissipation=300mW, Min Operating Temperature=-55°C, Package Quantity=1, Supplier Part Number 1=2N7002ET1GOSCT-ND, Threshold Voltage=1V, Category=MOSFETs, ComponentLink1Description=https://datasheet.ciiva.com/936/2n7002e-d-936787.pdf?src-supplier=Digi-Key, ComponentLink1URL=https://datasheet.ciiva.com/936/2n7002e-d-936787.pdf?src-supplier=Digi-Key, ComponentLink2Description=https://datasheet.ciiva.com/8059/2n7002e-d-8059427.pdf?src-supplier=Element14, ComponentLink2URL=https://datasheet.ciiva.com/8059/2n7002e-d-8059427.pdf?src-supplier=Element14, ComponentLink3Description=https://datasheet.ciiva.com/13060/2n7002e-d-105476-13060091.pdf?src-supplier=Mouser, ComponentLink3URL=https://datasheet.ciiva.com/13060/2n7002e-d-105476-13060091.pdf?src-supplier=Mouser, ComponentLink4Description=https://datasheet.ciiva.com/26146/2n7002e-d-26146200.pdf?src-supplier=Avnet+Europe, ComponentLink4URL=https://datasheet.ciiva.com/26146/2n7002e-d-26146200.pdf?src-supplier=Avnet+Europe, ComponentLink5Description=https://datasheet.ciiva.com/49018/70339334-49018202.pdf?src-supplier=Allied+Electronics, ComponentLink5URL=https://datasheet.ciiva.com/49018/70339334-49018202.pdf?src-supplier=Allied+Electronics, ComponentLink6Description=https://datasheet.ciiva.com/22641/1708226-22641627.pdf?src-supplier=Element14, ComponentLink6URL=https://datasheet.ciiva.com/22641/1708226-22641627.pdf?src-supplier=Element14, ComponentLink7Description=https://datasheet.ciiva.com/22641/1708226-22641628.pdf?src-supplier=Element14, ComponentLink7URL=https://datasheet.ciiva.com/22641/1708226-22641628.pdf?src-supplier=Element14, ComponentLink8Description=https://datasheet.ciiva.com/936/2n7002e-d-936788.pdf?src-supplier=Digi-Key, ComponentLink8URL=https://datasheet.ciiva.com/936/2n7002e-d-936788.pdf?src-supplier=Digi-Key, ComponentLink9Description=https://datasheet.ciiva.com/936/2n7002e-d-936789.pdf?src-supplier=Digi-Key, ComponentLink9URL=https://datasheet.ciiva.com/936/2n7002e-d-936789.pdf?src-supplier=Digi-Key, ComponentLink10Description=https://datasheet.ciiva.com/3304/2n7002e-d-3304389.pdf?src-supplier=Avnet, ComponentLink10URL=https://datasheet.ciiva.com/3304/2n7002e-d-3304389.pdf?src-supplier=Avnet, ComponentLink11Description=https://datasheet.ciiva.com/3304/2n7002e-d-3304390.pdf?src-supplier=Avnet, ComponentLink11URL=https://datasheet.ciiva.com/3304/2n7002e-d-3304390.pdf?src-supplier=Avnet, ComponentLink12Description=https://datasheet.ciiva.com/15198/getdatasheetpartid-53846-15198758.pdf?src-supplier=Verical, ComponentLink12URL=https://datasheet.ciiva.com/15198/getdatasheetpartid-53846-15198758.pdf?src-supplier=Verical, ComponentLink13Description=https://datasheet.ciiva.com/16305/2n7002e-d-16305452.pdf?src-supplier=Future+Electronics, ComponentLink13URL=https://datasheet.ciiva.com/16305/2n7002e-d-16305452.pdf?src-supplier=Future+Electronics, Element Configuration=Single, Fall Time=1.2ns, Halogen Free="Halogen Free", Height=0.94mm, Lead Free="Lead Free", Length=2.9mm, Manufacturer Part Number=2N7002ET1G, Nominal Vgs=1V, Number of Elements=1, Number of Pins=3, On-State Resistance=2.5R, Packaging="Cut Tape", Power Dissipation=300mW, Pricing 1="1=0.18000, 10=0.16300, 25=0.15520, 100=0.06820, 500=0.05356, 1000=0.03720 (USD)", Radiation Hardening=No, Rds On Max=2.5R, REACH SVHC="No SVHC", Rise Time=1.2ns, RoHS=Yes, Stock 1=151215, Supplier 1=Digi-Key, Turn-Off Delay Time=4.8ns, Turn-On Delay Time=1.7ns, Width=1.3mm

## Via types
v1: diameter 23.62, hole 11.81, Top Layer to Bottom Layer, 8 vias

## Nets (pads, with @x,y where several pads share a name; then routed paths per layer and width w, separated by ;. In a path a pad name is that pad's centre, name@x,y a point inside that pad or via, vN(x,y) a via of type N, cw(c..) or ccw(c..) an arc to the next point about the centre after c; other vN are vias at no path point)
+24V: D14.1 D17.1 R2.2 R4.2 | length 720.3
  Top Layer w10: D14.1@2715,3246.14 2763.86,3246.14 2795,3215 ; v1(2780,3215) 2795,3215 ; D17.1@2815,3153.39 D17.1@2818.39,3150 ; D17.1@2820,3140 2820,3153.39 2820,3190 2795,3215
  Bottom Layer w10: v1(2780,3215) 2790,3215 2825,3180 2823.46,3178.46 R2.2 2823.46,3120.47 2841.1,3102.83 2915.04,3102.83 2937.87,3080 3011.81,3080 3055,3036.81 R4.2
DISCH: R1.1 R3.2 U1.7 | length 182.8
  Top Layer w10: R1.1@2725,3340 2772.24,3340 ; v1(2770,3375) 2770,3342.24 2772.24,3340 ; R3.2 2819.49,3340 2772.24,3340
  Bottom Layer w10: v1(2770,3375) 2800.43,3375 U1.7
GND: 2.1 3.1 4.1 C1.2 C2.2 D16.2 D17.2 D18.2 J1.4 M?.1 R6.1 R8.1 U1.1 U2.2 U3.2
GREEN_IN: D13.1 D16.1 R7.1 R8.2 | length 339
  Top Layer w10: D13.1 2775.75,2911.93 D16.1@2830,2857.68 ; D16.1 D16.1@2830,2857.68 ; R8.2 R7.1 2883.19,2910.87 D16.1@2830,2857.68
NetD1_1: D1.1 U2.3 | length 252
  Top Layer w10: U2.3 2996.86,3361.44 3140.17,3361.44 3210.81,3290.81 ; D1.1@3222.07,3287.07 D1.1@3226.42,3282.72
NetD1_2: D1.2 D2.1 | length 243
  Top Layer w10: 3319.49,3298.03 3350.98,3298.03 3355.67,3293.35 3376.88,3293.35 3390.23,3280 3555,3280
NetD2_2: D2.2 D3.1 | length 251.3
  Top Layer w10: D2.2 3928.03,3288.03 3930,3290
NetD3_2: D3.2 D4.1 | length 322
  Top Layer w10: D3.2 4067.64,3293.03 4070.67,3290 v1(4185,3290)
  Bottom Layer w10: D4.1 4061.97,3291.97 4070,3300 4115.66,3300 4125.66,3290 v1(4185,3290)
NetD4_2: D4.2 D5.1 | length 281.9
  Bottom Layer w10: D5.1 3651.85,3281.85 3866.9,3281.85 3870.36,3285.32 3891.57,3285.32 3896.26,3290 D4.2
NetD5_2: D5.2 D6.1 | length 263.9
  Bottom Layer w10: 3276.65,3365.43 3416.93,3365.43 3504.33,3278.03
NetD6_2: D6.2 R2.1 | length 272.3
  Bottom Layer w10: R2.1@2996.54,3150 3220.24,3150 3254.57,3184.33
NetD7_1: D7.1 U3.3 | length 199
  Top Layer w10: U3.3 3121.3,2882.09 3186.26,2882.09 3208.77,2904.6 3222.91,2904.6 3244.49,2926.17 D7.1@3244.49,2962.95
NetD7_2: D7.2 D8.1 | length 210.9
  Top Layer w10: D7.2@3321.77,2940.32 3334.68,2940.32 3339.68,2935.32 3530.63,2935.32
NetD8_2: D8.2 D9.1 | length 213.8
  Top Layer w10: D8.2@3637.91,2935.32 3655.32,2935.32 3660,2940 3842.72,2940 3847.72,2935
NetD9_2: D9.2 D10.1 | length 332.7
  Top Layer w10: D9.2@3955,2935 v1@4155,2935
  Bottom Layer w10: D10.1@4033.43,2935 v1(4166.14,2935)
NetD10_2: D10.2 D11.1 | length 255.4
  Bottom Layer w10: D11.1 D10.2@3910,2940 ; D10.2@3941.14,2940 D10.2@3985.79,2940
NetD11_2: D11.2 D12.1 | length 0.4
  Bottom Layer w10: D11.2@3591.61,2940.32 D11.2
NetD12_2: D12.2 R4.1 | length 271.6
  Bottom Layer w10: R4.1 3061.89,2829.57 3172.64,2940.32 D12.2
NetD13_2: D13.2 J1.3 | length 176.3
  Top Layer w10: J1.3 2711.93,3025 D13.2
NetD14_2: D14.2 J1.2 | length 167.1
  Top Layer w10: J1.2 2700,3125 D14.2@2705,3120
NetD15_2: D15.2 J1.1 | length 197
  Bottom Layer w10: J1.1 2600,3225 2641.14,3266.14 D15.2
NetR5_2: R5.2 U2.1 | length 65.4
  Top Layer w10: R5.2 2901.69,3276.69 U2.1
NetR7_2: R7.2 U3.1 | length 112.4
  Top Layer w10: R7.2 2946.89,2840 2961.57,2854.69 2961.57,2864.18 2987.52,2890.12 3005.31,2890.12 U3.1
OUT: R5.1 R6.2 U1.3 | length 301
  Top Layer w10: R6.2 2890,3345.87 2906.89,3345.87 2925,3363.98 2925,3401.31 2930,3406.31 v1(2930,3410)
  Bottom Layer w10: v1(2930,3410) 2930,3393.27 3013.27,3310 U1.3
RED_IN: C1.1 D15.1 D18.1 R1.2 U1.4 U1.8 | length 956.8
  Top Layer w10: C1.1@2665,3401.97 2666.97,3400 R1.2 2735,3410 v1(2770,3410)
  Bottom Layer w10: D18.1 2720,2945.59 D15.1 2739.02,3169.02 2739.02,3215.32 2759.02,3235.32 2759.02,3296.96 2750.23,3305.75 2745.86,3305.75 2740,3311.61 2740,3390 2757.39,3407.39 2767.39,3407.39 v1(2770,3410) U1.8 2830,3410 2835,3405 2835.55,3405.55 2836.61,3405.55 2982.17,3260 U1.4
TRIG: C2.1 R3.1 U1.2 U1.6 | length 1036.4
  Top Layer w10: v1(2775,3320) 2778.5,3320 2819.02,3279.49 R3.1 2847.57,3279.49 2853.43,3273.63 2853.43,3244.1 2863.39,3234.13 2983.5,3234.13 ; C2.1 3110,3056.5 3110,3090.87 3060.82,3140.05 3060.82,3168.78 3009.6,3220 3005,3220 2990.87,3234.13 2983.5,3234.13 ; v1(3073.07,3388.26) 3070.38,3388.26 3052.77,3405.87 2969.1,3405.87 2960.31,3397.08 2960.31,3329.53 2969.85,3320 2982.75,3320 2992.28,3310.47 2992.28,3242.92 2983.5,3234.13
  Bottom Layer w10: v1(2775,3320) 2785.01,3320 2795.01,3310 U1.6 ; U1.2 3045.35,3360 3073.07,3387.72 v1(3073.07,3388.26)
pads on no net: U1.5

## Polygon pours and split planes (outlines as drawn)
no net on Bottom Layer "NONET_L02_P000" (solid, pour order 0): 2395,3495 3050,3495 3050,2790 2400,2790
no net on Top Layer "NONET_L01_P001" (solid, pour order 1): 4530,3815 4675,3670 4675,2605 4535,2465 4530,2470 2385,2470 2255,2600 2245,2600 2245,3675 2385,3815

## Silkscreen, mask and mechanical layers (free items; w line width, h text height)
Top Overlay:
  text "TSAL 2020" at 4404,3486 h39.37 r270
  text "UBC Formula Electric" at 4311,3481 h39.37 r270
  text "Pedro L." at 4215,3478 h39.37 r270
Bottom Overlay:
  drawing of 2532 lines, arcs and shapes, not listed
Mechanical 1:
  lines w19.68: 2205,2430 4705,2430 4705,3845 2205,3845 2205,2430